# Altium PCB TX.PcbDoc
Units mil, origin at the board's own origin, x right, y up, seen from the top; angles counter-clockwise.
Board outline 2353.78 x 2060.03 mil, 2 copper layers (Top Layer, Bottom Layer); 7 components, 14 nets, 61 pads, 0 vias.
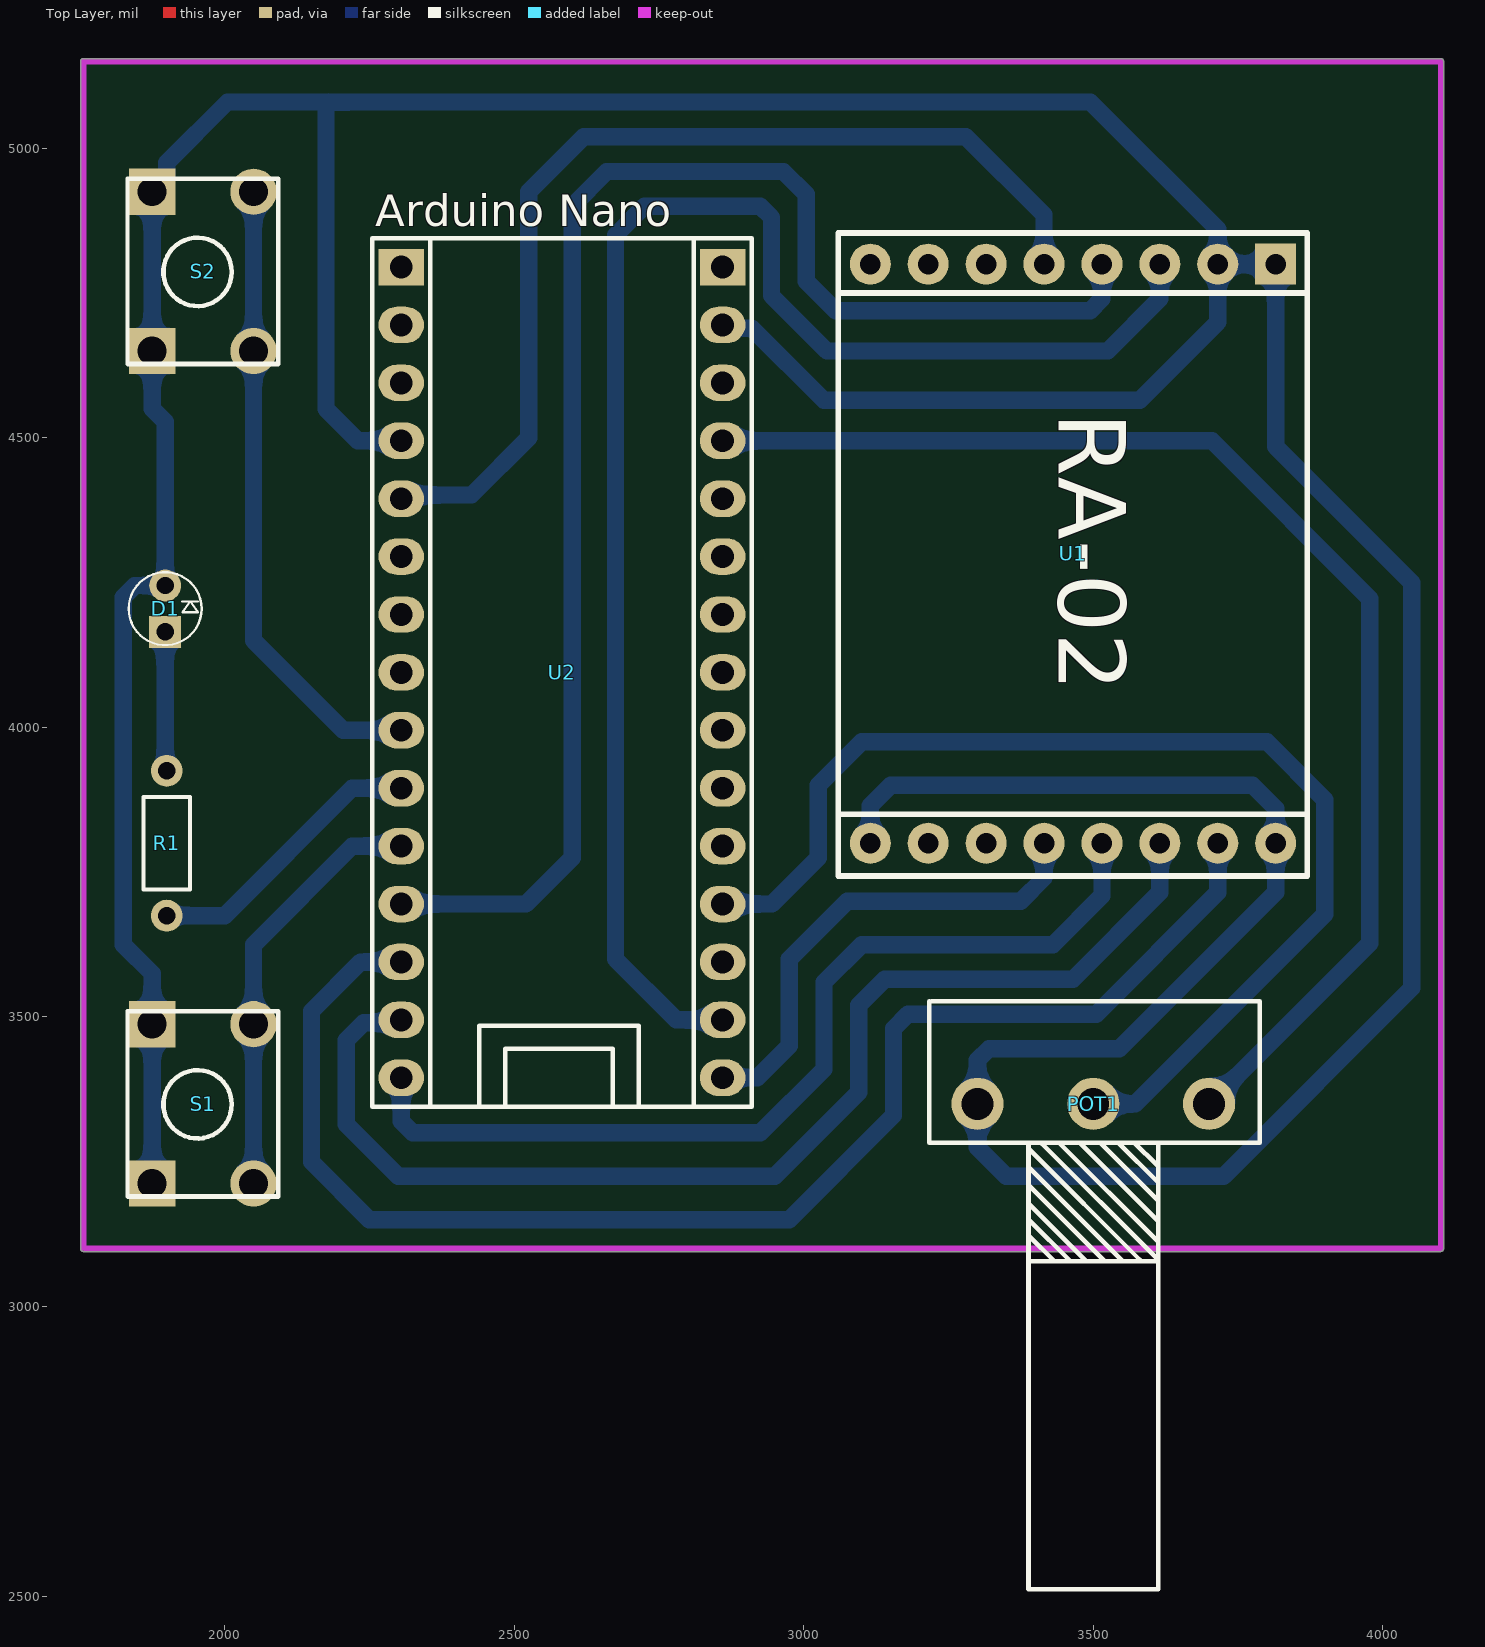
[diagram p0: Top Layer view]
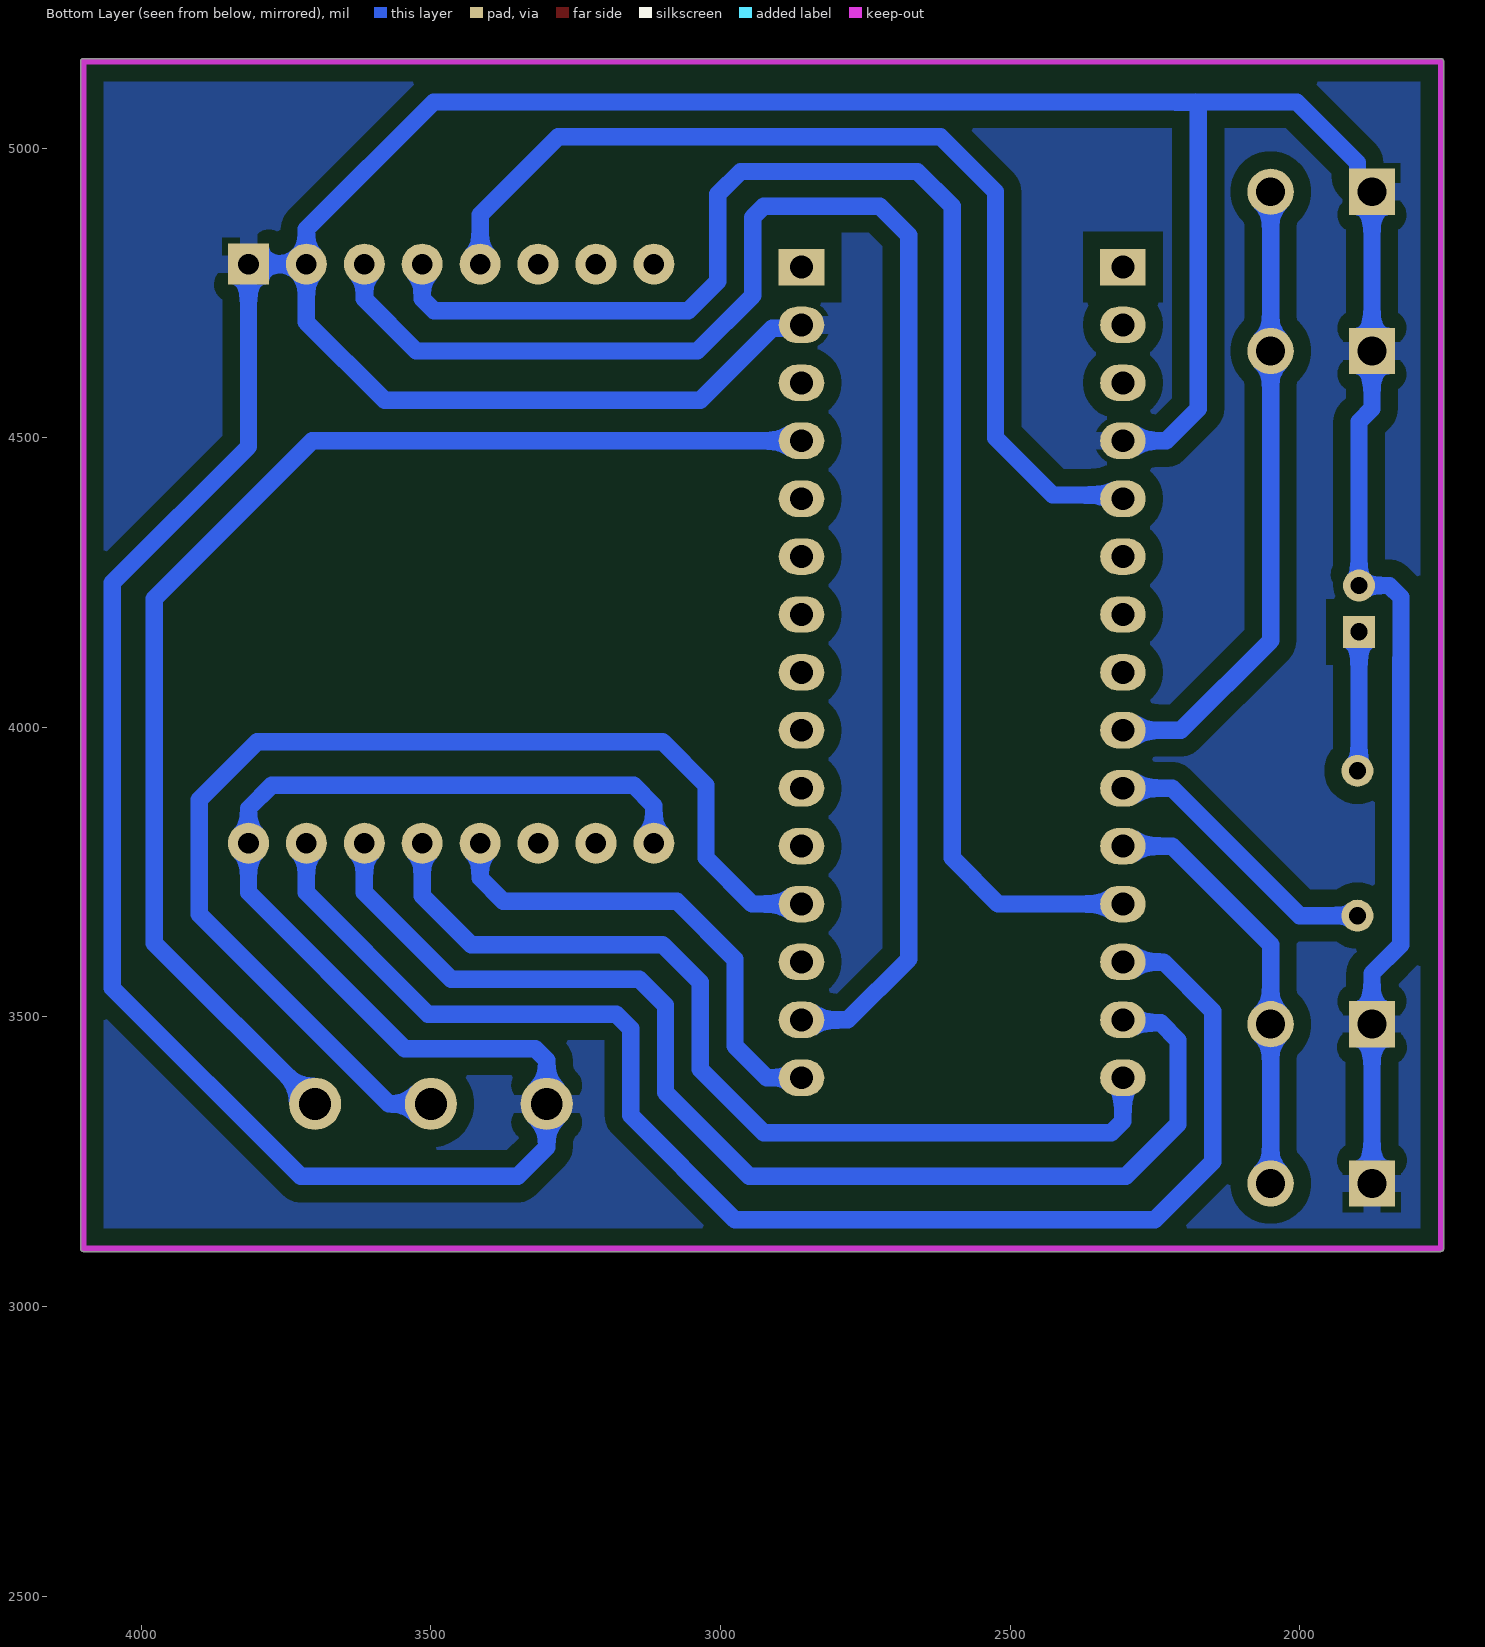
[diagram p1: Bottom Layer view, seen from below]
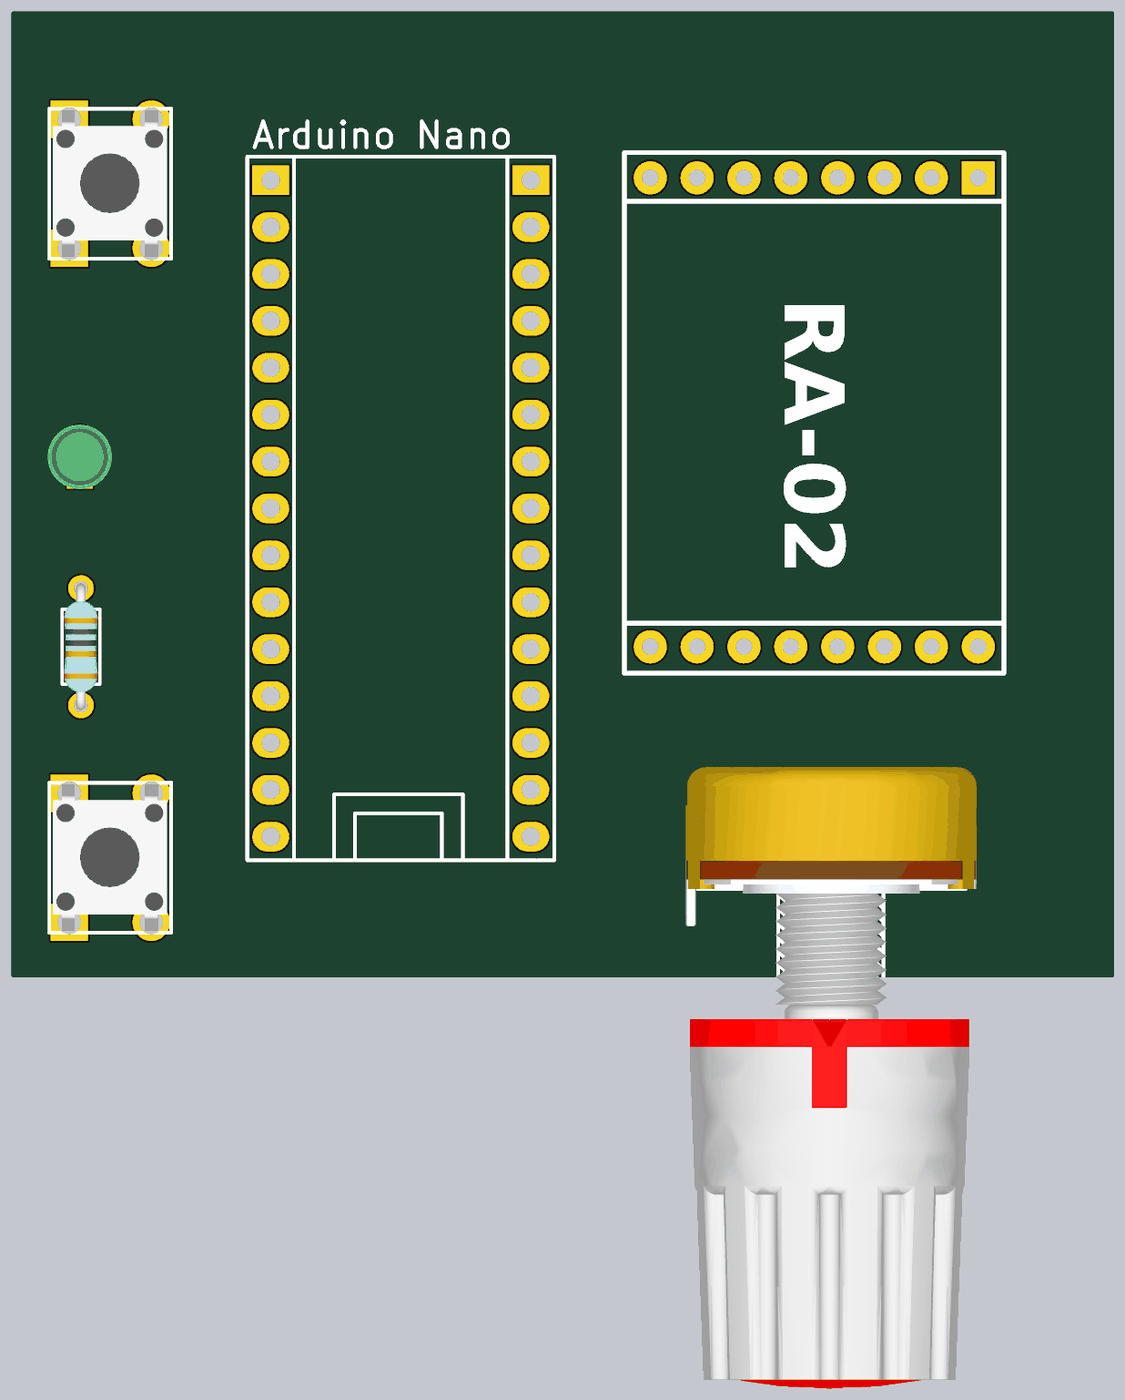
[diagram p2: 3D render of the assembled board from above, using the file's embedded part models]

## Layer stack, top to bottom
Top Solder: solder mask 0.4, Solder Resist, Dk 3.5
Top Layer: signal copper 1.4
Dielectric 1: dielectric 12.6, FR-4, Dk 4.8
Bottom Layer: signal copper 1.4
Bottom Solder: solder mask 0.4, Solder Resist, Dk 3.5

## Board outline
1751.23,3100 1751.23,5150 cw(c1756.25,5150) 1756.25,5155.02 4100,5155.02 cw(c4100,5150) 4105.02,5150 4105.02,3100 cw(c4100,3100) 4100,3094.99 1756.25,3094.99 cw(c1756.25,3100)

## Design rules (kind name [scope] priority, off if disabled: settings)
Clearance [All] p1: gap=30 ignorepadtopadclearanceinfootprint=FALSE except(10: THPad-THPad)
PolygonConnect [All] p1: connectstyle=Relief reliefconductorwidth=30 reliefentries=4 polygonreliefangle="90 Angle" airgapwidth=10
RoutingVias [All] p1: holewidth=28 width=50 viastyle="Through Hole" minholewidth=28 minwidth=50 maxholewidth=28 maxwidth=50
SilkToSolderMaskClearance [IsPad] p1: minsilkscreentomaskgap=0 clearancetoexposedcopper=TRUE
SolderMaskExpansion [All] p1: expansion=4 istentingtop=FALSE
Width [All] p1: maxlimit=200 minlimit=30 preferedwidth=70 minimp=50.000000 maximp=50.000000 favimp=50.000000
29 further rules are at their usual default settings.

## Components (designator, comment, footprint, x,y, rotation, side; value= is the part's Value field where it differs from the comment)
D1 "LED" LED3mm_GRN 1897.36,4205 r90 top
POT1 "10K" POT 3300,3350 r0 top
R1 "220R" RES-(1/4) 1900,3800 r270 top
S1 "Switch PB" "Switch - Push to On" 1962.5,3350 r90 top
S2 "Switch PB" "Switch - Push to On" 1962.5,4787.5 r90 top
U1 "RA-02" RA-02 3815,4800 r270 top
U2 "Arduino Nano" Arduino_Nano328 2582.5,4095 r90 top

## Footprints (in the part's own frame and the unit in brackets; to place one, negate y for a bottom-side part, rotate by r counter-clockwise, add the part's x,y. Pads: shape width x height; smd on the part's side, far side on the other; paste and mask are expansions set on the pad)
Arduino_Nano328 [mm]
  rect 1.6x2 hole 1: 1(17.78,7.049) 30(17.78,-7.048)
  oval 1.6x2 hole 1: 2(15.24,7.049) 3(12.7,7.049) 4(10.16,7.048) 5(7.62,7.048) 6(5.08,7.048) 7(2.54,7.048) 8(0,7.048) 9(-2.54,7.048) 10(-5.08,7.048) 11(-7.62,7.048) 12(-10.16,7.048) 13(-12.7,7.048) 14(-15.24,7.048) 15(-17.78,7.048) 16(-17.78,-7.049) 17(-15.24,-7.049) 18(-12.7,-7.049) 19(-10.16,-7.048) 20(-7.62,-7.048) 21(-5.08,-7.048) 22(-2.54,-7.048) 23(0,-7.048) 24(2.54,-7.048) 25(5.08,-7.048) 26(7.62,-7.048) 27(10.16,-7.048) 28(12.7,-7.048) 29(15.24,-7.048)
  silkscreen extent -19.05,-8.32 19.05,8.32
LED3mm_GRN [mil]
  rect 55x55 hole 30: 1(-40,0)
  round 55 hole 30: 2(40,0)
  silkscreen extent -63,-63 63,63, body extent -69,-69 69,69, height 154
POT [mil] "Voloume"
  round 90 hole 55: 1(0,0) 2(400,0) 3(200,0)
  silkscreen extent -83,-839 487,177, body extent -109,-1132 511,193, height 926
RA-02 [mm]
  rect 1.8x1.8 hole 0.9: 1(0,0)
  round 1.8 hole 0.9: 2(0,-2.54) 3(0,-5.08) 4(0,-7.62) 5(0,-10.16) 6(0,-12.7) 7(0,-15.24) 8(0,-17.78) 9(25.4,-17.78) 10(25.4,-15.24) 11(25.4,-12.7) 12(25.4,-10.16) 13(25.4,-7.62) 14(25.4,-5.08) 15(25.4,-2.54) 16(25.4,0)
  silkscreen extent -1.36,-19.19 26.83,1.39
RES-(1/4) [mil]
  round 55 hole 30: 1(-125,0) 2(125,0)
  silkscreen extent -80,-40 80,40, body extent -135,-36 135,36, height 115
"Switch - Push to On" [mil]
  rect 80x80 hole 50: 1(-137.5,87.5) 1(137.5,87.5)
  round 80 hole 50: 2(-137.5,-87.5) 2(137.5,-87.5)
  silkscreen extent -160,-130 160,130, body extent -155,-121 157,123, height 205

## Part data
D1: library part "LED 3MM", "Light Emitting Diode", Designer="Ali Hafizi"
POT1: library part POT, "Variable Resistor"
R1: library part "RES DIP PACKAGE", "TOTAL DIP RESISTOR PACK", Designer="Ali Hafizi"
S1 S2: "Push Button Switch"
U2: "Arduino Nano 328"

## Nets (pads, with @x,y where several pads share a name; then routed paths per layer and width w, separated by ;. In a path a pad name is that pad's centre, name@x,y a point inside that pad or via, vN(x,y) a via of type N, cw(c..) or ccw(c..) an arc to the next point about the centre after c; other vN are vias at no path point)
+3V3: U1.3 U2.17 | length 2719
  Bottom Layer w30: U2.17 2780,3495 2675,3600 2675,4850 2725,4900 2925,4900 2944.37,4880.63 2944.37,4745.78 3040.15,4650 3525,4650 3615,4740 U1.3
+5V: POT1.2 U2.27 | length 2217.9
  Bottom Layer w30: U2.27 3705,4495 3977.57,4222.43 3977.57,3627.57 POT1.2
A0: POT1.3 U2.19 | length 2003.9
  Bottom Layer w30: U2.19 2945,3695 3025,3775 3025,3900 3100,3975 3800,3975 3900,3875 3900,3677.28 3572.72,3350 POT1.3
D0: U1.5 U2.5 | length 1758.8
  Bottom Layer w30: U2.5 2311.31,4401.31 2426.31,4401.31 2525,4500 2525,4925 2620,5020 3280,5020 3415,4885 U1.5
D6: S2.2 U2.9 | length 1094.2
  Bottom Layer w30: S2.2@2050,4925 2050,4650 2050,4150 2205,3995 U2.9
D7: R1.2 U2.10 | length 496.1
  Bottom Layer w30: R1.2 2000,3675 2220,3895 U2.10
D8: S1.2 U2.11 | length 737.9
  Bottom Layer w30: S1.2@2050,3212.5 2050,3487.5 2050,3625 2220,3795 U2.11
GND: D1.2 POT1.1 S1.1 S2.1 U1.1 U1.2 U1.9 U1.16 U2.4 U2.29 | length 9701.7
  Bottom Layer w30: S1.1@1875,3212.5 1875,3487.5 1875,3575 1825,3625 1825,4118.72 1824.86,4118.86 1824.86,4224.86 1845,4245 D1.2 1897.36,4527.64 1875,4550 1875,4650 1875,4925 1900,4950 1900,4975 2005,5080 2180,5080 ; U2.4 2230,4495 2175,4550 2175,5075 2180,5080 ; U2.29 2865.53,4689.47 2910.53,4689.47 3035,4565 3580,4565 3715,4700 U1.2 ; U1.9 3115,3865 3150,3900 3775,3900 3815,3860 U1.16 3815,3715 3545,3445 3320,3445 3300,3425 POT1.1 3300,3275 3350,3225 3725,3225 4050,3550 4050,4250 3815,4485 U1.1 U1.2 ; 2180,5080 3495,5080 3715,4860 U1.2
MISO: U1.13 U2.15 | length 1641.3
  Bottom Layer w30: U2.15 2305,3320 2325,3300 2925,3300 3035,3410 3035,3560 3100,3625 3430.54,3625 3515,3709.46 U1.13
MOSI: U1.14 U2.14 | length 2072.6
  Bottom Layer w30: U2.14 2300,3490 2240,3490 2210,3460 2210,3315 2300,3225 2950,3225 3095,3370 3095,3520 3140,3565 3465,3565 3615,3715 U1.14
NetD1_1: D1.1 R1.1 | length 241.1
  Bottom Layer w30: D1.1 1897.36,3927.64 R1.1
NSS: U1.15 U2.13 | length 2463.5
  Bottom Layer w30: U2.13 2235,3595 2150,3510 2150,3250 2250,3150 2975,3150 3155,3330 3155,3480 3180,3505 3505,3505 3715,3715 U1.15
RST: U1.4 U2.12 | length 2648.9
  Bottom Layer w30: U2.12 2520,3695 2600,3775 2600,4900 2660,4960 2965,4960 3004.37,4920.63 3004.37,4770.63 3055.43,4719.57 3494.57,4719.57 3515,4740 U1.4
SCK: U1.12 U2.16 | length 845.8
  Bottom Layer w30: U2.16 2920,3395 2975,3450 2975,3600 3075,3700 3375,3700 3415,3740 U1.12
pads on no net: U1.6 U1.7 U1.8 U1.10 U1.11 U2.1 U2.2 U2.3 U2.6 U2.7 U2.8 U2.18 U2.20 U2.21 U2.22 U2.23 U2.24 U2.25 U2.26 U2.28 U2.30

## Polygon pours and split planes (outlines as drawn)
GND on Bottom Layer "G_Bottom" (solid, remove dead copper, pour order 0): 1750,5160 4110,5160 4110,3090 1750,3090

## Keep-outs
Keep-Out Layer:
  lines w10: 1756.25,3100 4100,3100 4100,5150 1756.25,5150 1756.25,3100